# Altium PCB EEPROM_Programmer.PcbDoc
Units mil, origin at the board's own origin, x right, y up, seen from the top; angles counter-clockwise.
Board outline 1655 x 1780 mil, 2 copper layers (Top Layer, Bottom Layer); 4 components, 31 nets, 90 pads, 11 vias.
Unrouted connection lines stored in the file: 2.
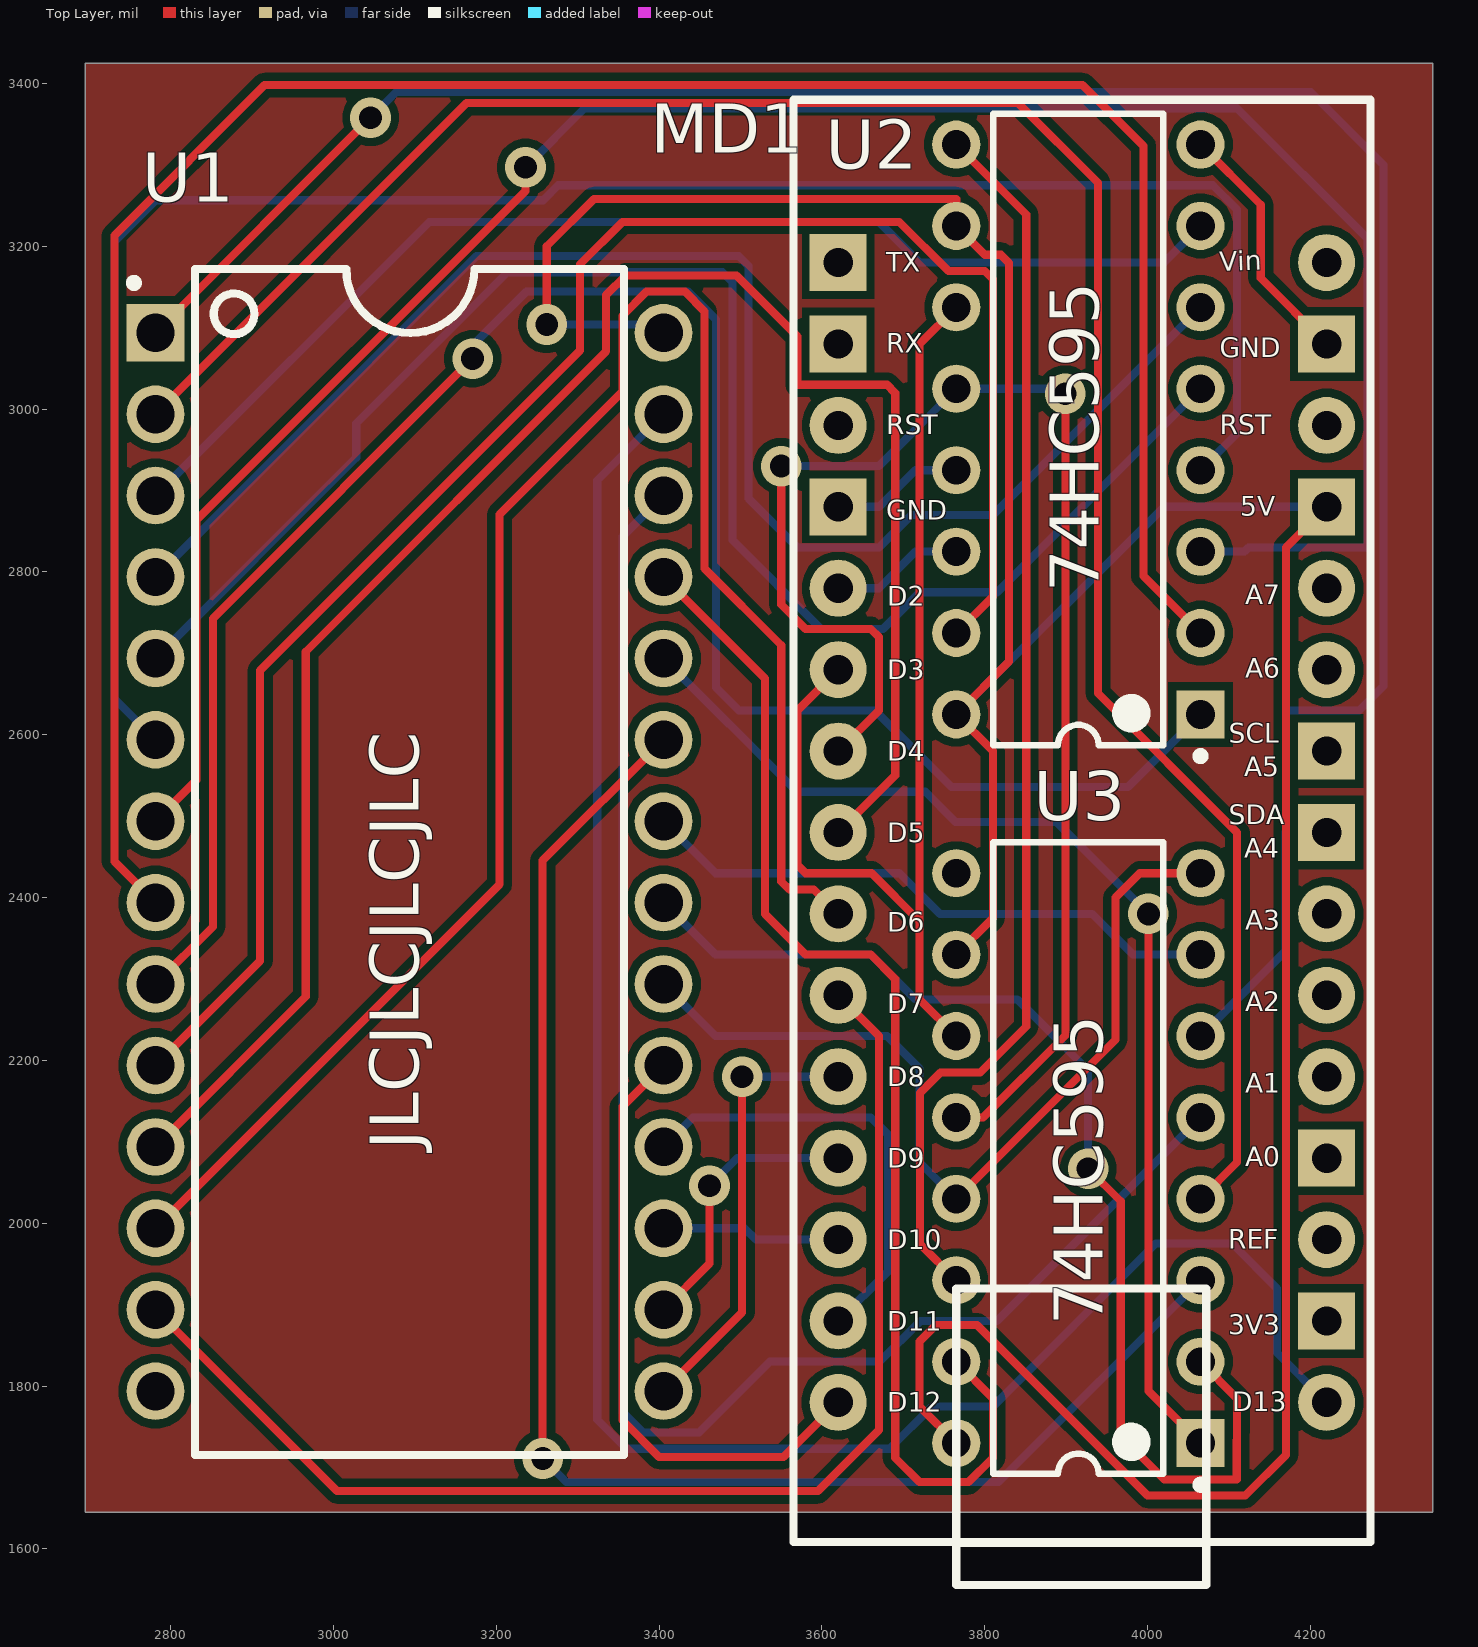
[diagram p0: Top Layer view]
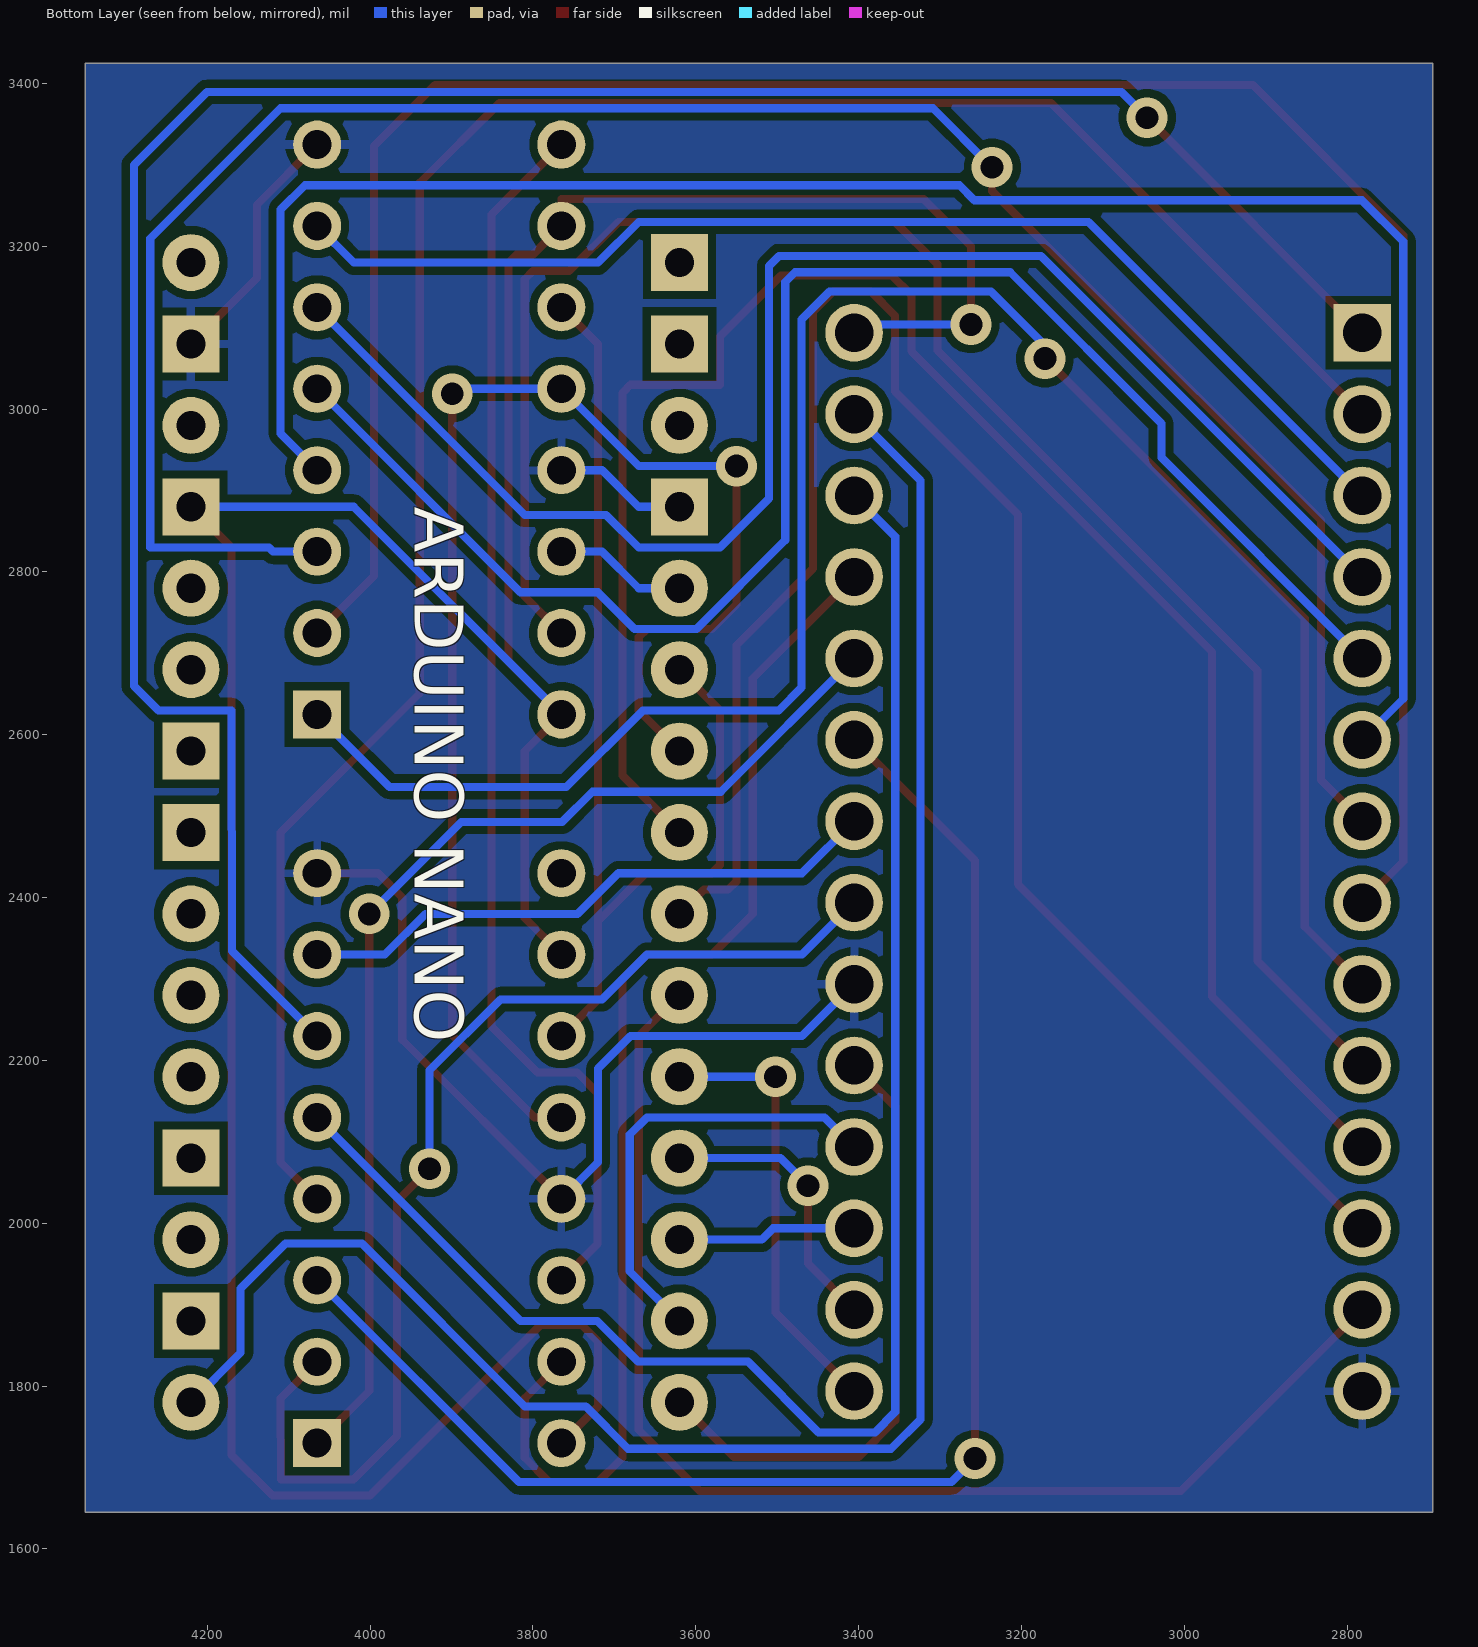
[diagram p1: Bottom Layer view, seen from below]

## Layer stack, top to bottom
Top Solder: solder mask 0.4, Solder Resist, Dk 3.5
Top Layer: signal copper 1.4
Dielectric 1: dielectric 12.6, FR-4, Dk 4.8
Bottom Layer: signal copper 1.4
Bottom Solder: solder mask 0.4, Solder Resist, Dk 3.5

## Board outline
2695,1645 2695,3425 4350,3425 4350,1645

## Design rules (kind name [scope] priority, off if disabled: settings)
Clearance [All] p1: gap=10 ignorepadtopadclearanceinfootprint=FALSE except(0: Arc-Hole Track-Hole SMDPad-Hole THPad-Hole Via-Hole Fill-Hole Poly-Hole Region-Hole Text-Hole)
PolygonConnect [All] p1: connectstyle=Relief reliefconductorwidth=10 reliefentries=4 polygonreliefangle="90 Angle" airgapwidth=10
RoomDefinition EEPROM_Programmer [InComponentClass('EEPROM_Programmer')] p1: confinementstyle=ConfineIn formatcopy=TRUE lockcomponents=FALSE outline 2695,1490 4350.45,1490 4350.45,3425 2695,3425
RoutingVias [All] p1: holewidth=28 width=50 viastyle="Through Hole" minholewidth=28 minwidth=50 maxholewidth=28 maxwidth=50
SolderMaskExpansion SolderMaskExpansion_1 [IsVia] p1: expansion=4 istentingtop=TRUE
SolderMaskExpansion [All] p2: expansion=4 istentingtop=FALSE
Width [All] p1: maxlimit=10 minlimit=10 preferedwidth=10
30 further rules are at their usual default settings.

## Classes and differential pairs
component class EEPROM_Programmer: MD1 U2 U3

## Components (designator, comment, footprint, x,y, rotation, side; value= is the part's Value field where it differs from the comment)
MD1 "Arduino Nano" ARDUINO_NANO 3915,2490 r0 top
U1 "AT28C256" DIP_28 3085,2465 r270 top
U2 "SN74HC595N" N0016A 3915,2975 r180 top
U3 "SN74HC595N" N0016A 3915,2080 r180 top

## Footprints (in the part's own frame and the unit in brackets; to place one, negate y for a bottom-side part, rotate by r counter-clockwise, add the part's x,y. Pads: shape width x height; smd on the part's side, far side on the other; paste and mask are expansions set on the pad)
ARDUINO_NANO [mil]
  rect 70x70 hole 36: 1(-295,690) 2(-295,590) 4(-295,390) 17(305,-610) 19(305,-410) 23(305,-10) 24(305,90) 27(305,390) 29(305,590)
  round 70 hole 36: 3(-295,490) 5(-295,290) 6(-295,190) 7(-295,90) 8(-295,-10) 9(-295,-110) 10(-295,-210) 11(-295,-310) 12(-295,-410) 13(-295,-510) 14(-295,-610) 15(-295,-710) 16(305,-710) 18(305,-510) 20(305,-310) 21(305,-210) 22(305,-110) 25(305,190) 26(305,290) 28(305,490) 30(305,690)
  silkscreen extent -350,-934 359,890, body extent -351,-935 361,890, height 433
DIP_28 [mm]
  rect 1.8x1.8 hole 1.2: 1(-15.972,-7.71)
  round 1.8 hole 1.2: 2(-13.432,-7.71) 3(-10.892,-7.71) 4(-8.352,-7.71) 5(-5.812,-7.71) 6(-3.272,-7.71) 7(-0.732,-7.71) 8(1.808,-7.71) 9(4.348,-7.71) 10(6.888,-7.71) 11(9.428,-7.71) 12(11.968,-7.71) 13(14.508,-7.71) 14(17.048,-7.71) 15(17.048,8.139) 16(14.508,8.139) 17(11.968,8.139) 18(9.428,8.139) 19(6.888,8.139) 20(4.348,8.139) 21(1.808,8.139) 22(-0.732,8.139) 23(-3.272,8.139) 24(-5.812,8.139) 25(-8.352,8.139) 26(-10.892,8.139) 27(-13.432,8.139) 28(-15.972,8.139)
  silkscreen extent -17.96,-8.51 19.04,6.91, body extent -18.67,-6.42 19.43,6.93, height 4.83
N0016A [mm] "DIP, 16-Leads, Body 19.7x6.6mm, Pitch 2.54mm"
  rect 1.5x1.5 hole 0.9: 1(-3.81,8.89)
  round 1.5 hole 0.9: 2(-3.81,6.35) 3(-3.81,3.81) 4(-3.81,1.27) 5(-3.81,-1.27) 6(-3.81,-3.81) 7(-3.81,-6.35) 8(-3.81,-8.89) 9(3.81,-8.89) 10(3.81,-6.35) 11(3.81,-3.81) 12(3.81,-1.27) 13(3.81,1.27) 14(3.81,3.81) 15(3.81,6.35) 16(3.81,8.89)
  silkscreen extent -3.94,-9.85 2.65,10.31, body extent -3.95,-9.85 3.95,9.85, height 5.08

## Part data
MD1: library part Arduino_Nano, "Arduino Nano board"
U1: "Paged Parallel EEPROM AT28C256"
U2 U3: library part CMP-0780-00137-3, "8-Bit Shift Registers With 3-State Output Registers, N0016A, TUBE", F @ Nom Voltage(Max)(Mhz)=28, Generic Part Number=SN74HC595, ICC @ Nom Voltage(Max)(mA)=0.08, Manufacturer="Texas Instruments", Operating Temperature Range(C)="-40 to 85", Rating=Military, tpd @ Nom Voltage(Max)(ns)=34, Voltage(Nom)(V)=6, 3-State Output=Yes, Bits=8, Code_JEDEC=MS-001, DatasheetVersion=SCLS041H, Input Type=CMOS, Output Drive (IOL/IOH)(Max)(mA)=7.8/-7.8, Output Type=CMOS, PackageReference=N0016A, PackageVersion=http://www.ti.com/lit/ml/mpdi002c/mpdi002c.pdf, Technology Family=HC, VCC(Max)(V)=6, VCC(Min)(V)=2

## Via types
v1: diameter 50, hole 28, Top Layer to Bottom Layer, tented both sides, 11 vias

## Nets (pads, with @x,y where several pads share a name; then routed paths per layer and width w, separated by ;. In a path a pad name is that pad's centre, name@x,y a point inside that pad or via, vN(x,y) a via of type N, cw(c..) or ccw(c..) an arc to the next point about the centre after c; other vN are vias at no path point)
+5: MD1.27 U1.28 U2.10 U2.16 U3.10 U3.16 | length 4256.5
  Top Layer w10: v1(3262,3104) 3262,3200 3320,3258 3765,3258 U2.10 3800.47,3189.53 3820,3189.53 3830,3179.53 3830,2690 U2.16 3810,2580 3810,2375 U3.10 ; U3.16 3720,1775 3720,1855 3740,1875 3790.47,1875 4000,1665.47 4120,1665.47 4170,1715.47 4170,2830 MD1.27
  Bottom Layer w10: v1(3262,3104) 3395.27,3104 U1.28 ; U2.16 4020,2880 MD1.27
D0: MD1.8 U1.11 | length 2304
  Top Layer w10: U1.11 2966,2278.35 2966,2702 3335.02,3071.02 3335.02,3140 3359.27,3164.25 3495.08,3164.25 3570,3089.33 3570,3030 3680,3030 3690,3020 3690,2550 MD1.8
D1: MD1.9 U1.12 | length 2307.2
  Top Layer w10: U1.12 3204,2416.35 3204,2870.78 3355.02,3021.8 3355.02,3114.71 3384.56,3144.25 3431.63,3144.25 3455.88,3120 3455.88,2804.12 3550,2710 3550,2420 3560,2410 3590,2410 MD1.9
D2: MD1.10 U1.13 | length 1566.6
  Top Layer w10: U1.13 3004.29,1671 3595,1671 3670,1746 3670,2230 MD1.10
D3: MD1.11 U1.15 | length 544.2
  Top Layer w10: U1.15 3502,1890.37 v1(3502,2180)
  Bottom Layer w10: v1(3502,2180) MD1.11
D4: MD1.12 U1.16 | length 347.7
  Top Layer w10: U1.16 3462,1950.37 v1(3462,2046)
  Bottom Layer w10: v1(3462,2046) 3496,2080 MD1.12
D5: MD1.13 U1.17 | length 220.3
  Bottom Layer w10: U1.17 3505,1993.82 3518.82,1980 MD1.13
D6: MD1.14 U1.18 | length 553.5
  Bottom Layer w10: U1.18 3441.63,2130 3660,2130 3681,2109 3681,1941 MD1.14
D7: MD1.15 U1.19 | length 768.1
  Top Layer w10: U1.19 3355,2143.37 3355,1758 3400,1713 3553,1713 MD1.15
GND: MD1.4 MD1.29 U1.14 U1.20 U2.8 U2.13 U3.8 U3.13 | length 1577
  Top Layer w10: U3.13 3960.47,2225.47 3960.47,2400 3990.47,2430 U3.8 ; U2.8 4139,3251 4139,3161 MD1.29
  Bottom Layer w10: U1.20 3469.27,2230 3680,2230 3720,2190 3720,2075 U3.13 ; MD1.4 3670,2880 3715,2925 U2.13
NetU1_1: U1.1 U3.6 | length 2883.8
  Top Layer w10: U1.1 v1(3045.63,3358)
  Bottom Layer w10: v1(3045.63,3358) 3077.16,3389.53 4200.47,3389.53 4290,3300 4290,2660 4260,2630 4170,2630 4169.53,2334.53 U3.6
NetU1_2: U1.2 U3.4 | length 2693.9
  Top Layer w10: U1.2 3163.65,3376 3841,3376 3939,3278 3939,2651 4110,2480 4110,2075 U3.4
NetU1_3: U1.3 U2.7 | length 1462.1
  Bottom Layer w10: U1.3 3117.65,3230 3670,3230 3720,3180 4020,3180 U2.7
NetU1_4: U1.4 U2.6 | length 1884.9
  Bottom Layer w10: U1.4 3175.77,3188.12 3497.86,3188.12 3510,3175.98 3510,2890 3570,2830 3670,2830 3710,2870 3810,2870 U2.6
NetU1_5: U1.5 U2.5 | length 1994
  Bottom Layer w10: U1.5 3028,2940.35 3028,2982.43 3213.69,3168.12 3477.92,3168.12 3490,3156.03 3490,2839 3599,2730 3675,2730 3720,2775 3815,2775 U2.5
NetU1_6: U1.6 U2.4 | length 2391.7
  Bottom Layer w10: U1.6 2731,2644.29 2731,3206 2781.49,3256.49 3257.4,3256.49 3275.92,3275 4080,3275 4110,3245 4110,2970 U2.4
NetU1_7: U1.7 U2.3 | length 2708.4
  Top Layer w10: U1.7 2831.9,2544.25 2831.9,2864 3236,3268.1 v1(3236,3297)
  Bottom Layer w10: v1(3236,3297) 3308.53,3369.53 4110,3369.53 4270,3209.53 4270,2830 4124,2830 4119,2825 U2.3
NetU1_8: U1.8 U2.2 | length 2839.1
  Top Layer w10: U1.8 2731,2444.29 2731,3213.47 2915.53,3398 3920,3398 3995,3323 3995,2795 U2.2
NetU1_9: U1.9 U2.1 | length 2420.6
  Top Layer w10: U1.9 2851.9,2364.25 2851.9,2742.9 v1(3171,3062)
  Bottom Layer w10: v1(3171,3062) 3171,3078.05 3237.2,3144.25 3435.75,3144.25 3470,3110 3470,2658 3498,2630 3665,2630 3759,2536 3976,2536 U2.1
NetU1_10: U1.10 U2.15 | length 2211.1
  Top Layer w10: U1.10 2910,2322.35 2910,2679 3302.95,3071.95 3302.95,3177.95 3355,3230 3695,3230 3755.47,3169.53 3800,3169.53 3810,3159.53 3810,2770 U2.15
NetU1_21: U1.21 U3.2 | length 1400.3
  Top Layer w10: v1(3927,2067) 3967,2027 3967,1738.94 4020.47,1685.47 4109.53,1685.47 4110,1785 U3.2
  Bottom Layer w10: U1.21 3469.27,2330 3660,2330 3715,2275 3840,2275 3927,2188 v1(3927,2067)
NetU1_22: U1.22 U3.7 | length 727.4
  Bottom Layer w10: U1.22 3469.27,2430 3695,2430 3745,2380 3932,2380 3982,2330 U3.7
NetU1_23: U1.23 U3.3 | length 1867
  Top Layer w10: v1(3257,1711) 3257,2445.37 U1.23
  Bottom Layer w10: v1(3257,1711) 3286,1682 3817,1682 U3.3
NetU1_24: U1.24 U3.1 | length 1402
  Top Layer w10: v1(4001,2380) 4001,1794 U3.1
  Bottom Layer w10: U1.24 3569.27,2530 3727,2530 3764,2493 3888,2493 v1(4001,2380)
NetU1_25: U1.25 U3.15 | length 1528
  Top Layer w10: U1.25 3530,2669.27 3530,2380 3580,2330 3660,2330 3690,2300 3690,1712 3720,1682 3780,1682 3810,1712 3810,1785 U3.15
NetU1_26: U1.26 U3.5 | length 2027.4
  Bottom Layer w10: U1.26 3355,2843.37 3355,1768 3380,1743 3449,1743 3536,1830 3671,1830 3721,1880 3815,1880 U3.5
NetU2_9: U2.9 U3.14 | length 1531.9
  Top Layer w10: U3.14 3720.47,1974.53 3720.47,2160 3745.47,2185 3794.53,2185 3851,2241.47 3851,3239 U2.9
RCLK: MD1.7 U2.12 U3.12 | length 1822
  Top Layer w10: v1(3550,2930) 3550,2760 3580,2730 3660,2730 3670,2720 3670,2630 MD1.7 ; U3.12 3798,2130 3899,2231 v1(3899,3019)
  Bottom Layer w10: v1(3550,2930) 3670,2930 U2.12 3893,3025 v1(3899,3019)
SER1: MD1.5 U2.14 | length 163.6
  Bottom Layer w10: MD1.5 3670,2780 3715,2825 U2.14
SRCLK: MD1.6 U2.11 U3.11 | length 1371.6
  Top Layer w10: MD1.6 3570,2630 3570,2440 3580,2430 3661,2430 3720,2371 ; U3.11 3720,2275 3720,2371 ; U2.11 3720,3080 3720,2371
WE: MD1.16 U1.27 | length 2410.9
  Bottom Layer w10: U1.27 3324,2912.37 3324,1759 3360,1723 3683,1723 3735,1775 3810,1775 4010,1975 4104,1975 4159,1920 4159,1841 MD1.16
pads on no net: MD1.1 MD1.2 MD1.3 MD1.17 MD1.18 MD1.19 MD1.20 MD1.21 MD1.22 MD1.23 MD1.24 MD1.25 MD1.26 MD1.28 MD1.30 U3.9

## Polygon pours and split planes (outlines as drawn)
GND on Bottom Layer "GND_L02_P000" (solid, pour order 0): 2695,3425 2695,1645 4350,1645 4350,3425
no net on Top Layer "NONET_L01_P001" (solid, pour order 1): 2695,3425 2695,1645 4350,1645 4350,3425

## Silkscreen, mask and mechanical layers (free items; w line width, h text height)
Top Overlay:
  text "74HC595" at 3940,2775 h60 r90
  text "JLCJLCJLCJLC" at 3105,2090 h60 r90
  text "74HC595" at 3945,1875 h60 r90
Bottom Overlay:
  text "ARDUINO NANO" at 3945,2880 h60 r90
Mechanical 6:
  the board outline again, w2.7

## Text inside footprints (layer, text, board x,y; h text height)
MD1: Top Overlay "A1" at 4120,2160.29 h23.62; Top Overlay "SDA" at 4100,2490.29 h23.62; Top Overlay "SCL" at 4100,2590.29 h23.62; Top Overlay "D13" at 4103.94,1768.94 h23.62; Top Overlay "3V3" at 4098.94,1863.94 h23.62; Top Overlay "REF" at 4098.94,1968.94 h23.62; Top Overlay "A0" at 4120,2070.29 h23.62; Top Overlay "A2" at 4120,2260.29 h23.62; Top Overlay "A3" at 4120,2360.29 h23.62; Top Overlay "A4" at 4118.94,2448.94 h23.62; Top Overlay "A5" at 4118.94,2548.94 h23.62; Top Overlay "A6" at 4120,2670.29 h23.62; Top Overlay "A7" at 4120,2760.29 h23.62; Top Overlay "5V" at 4113.94,2868.94 h23.62; Top Overlay "RST" at 4088.94,2968.94 h23.62; Top Overlay "GND" at 4088.94,3063.94 h23.62; Top Overlay "Vin" at 4088.8,3169.07 h23.62 r2; Top Overlay "D12" at 3680,1768.19 h23.62; Top Overlay "D11" at 3680,1868.19 h23.62; Top Overlay "D10" at 3680,1968.19 h23.62; Top Overlay "D9" at 3680,2068.19 h23.62; Top Overlay "D8" at 3680,2168.19 h23.62; Top Overlay "D7" at 3680,2258.19 h23.62; Top Overlay "D6" at 3680,2358.19 h23.62; Top Overlay "D5" at 3680,2468.19 h23.62; Top Overlay "D4" at 3680,2568.19 h23.62; Top Overlay "D3" at 3680,2668.19 h23.62; Top Overlay "D2" at 3680,2758.19 h23.62; Top Overlay "GND" at 3678.94,2863.94 h23.62; Top Overlay "RST" at 3678.94,2968.94 h23.62; Top Overlay "TX" at 3678.94,3168.94 h23.62; Top Overlay "RX" at 3678.94,3068.94 h23.62